# EAGLE board Group_08_alternative (EAGLE 9.6.2)
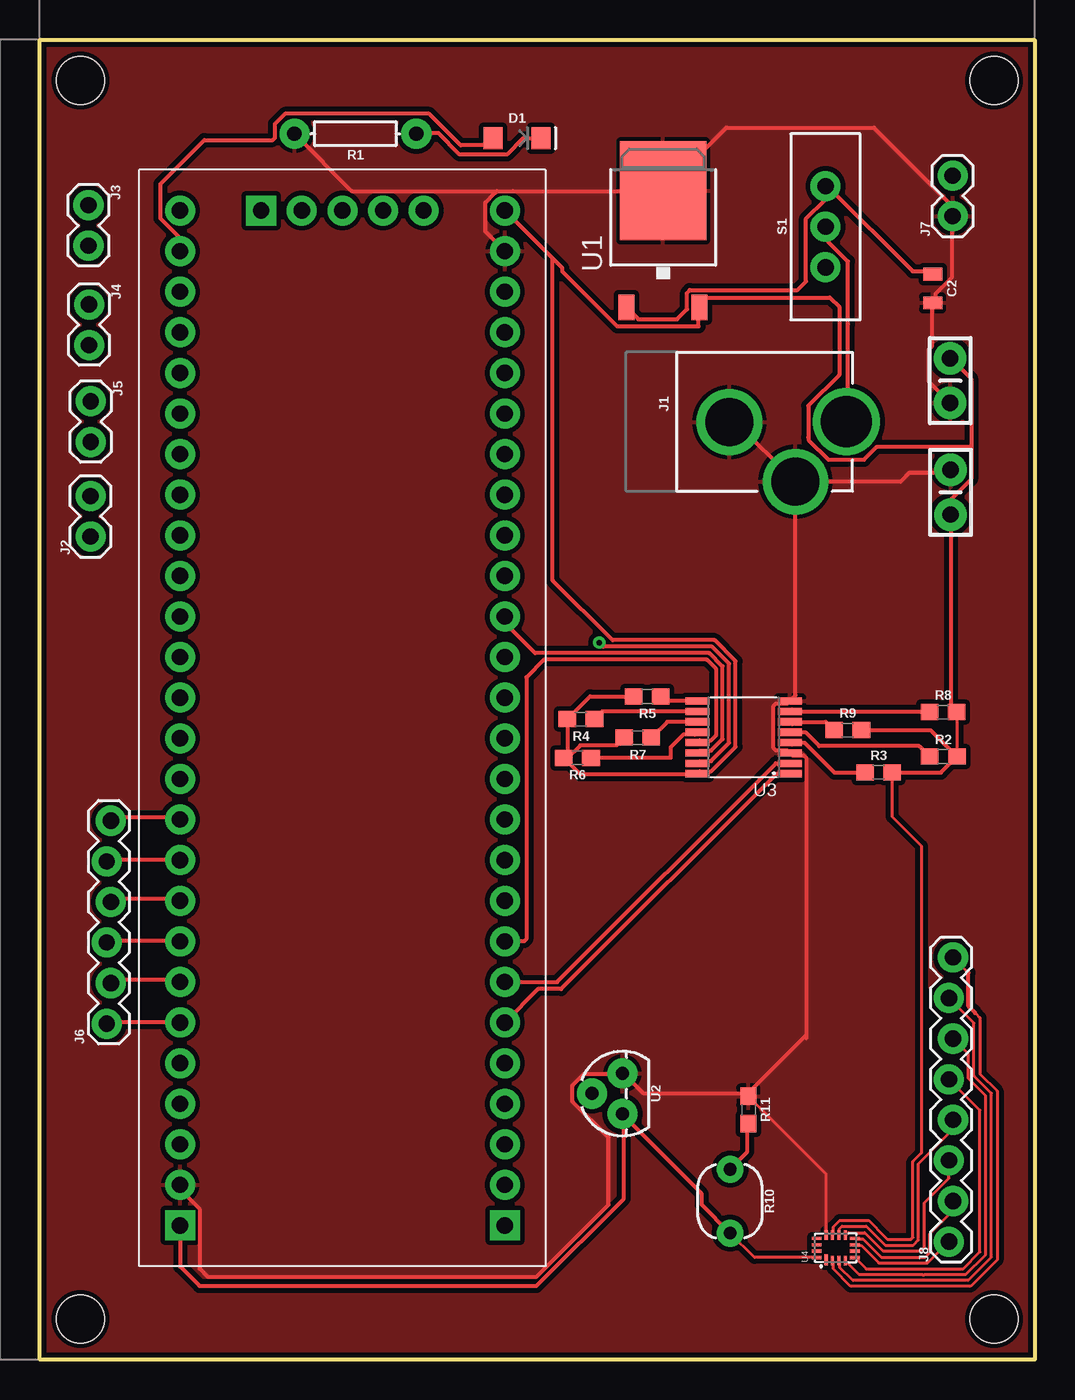
[diagram p0: board, top side]
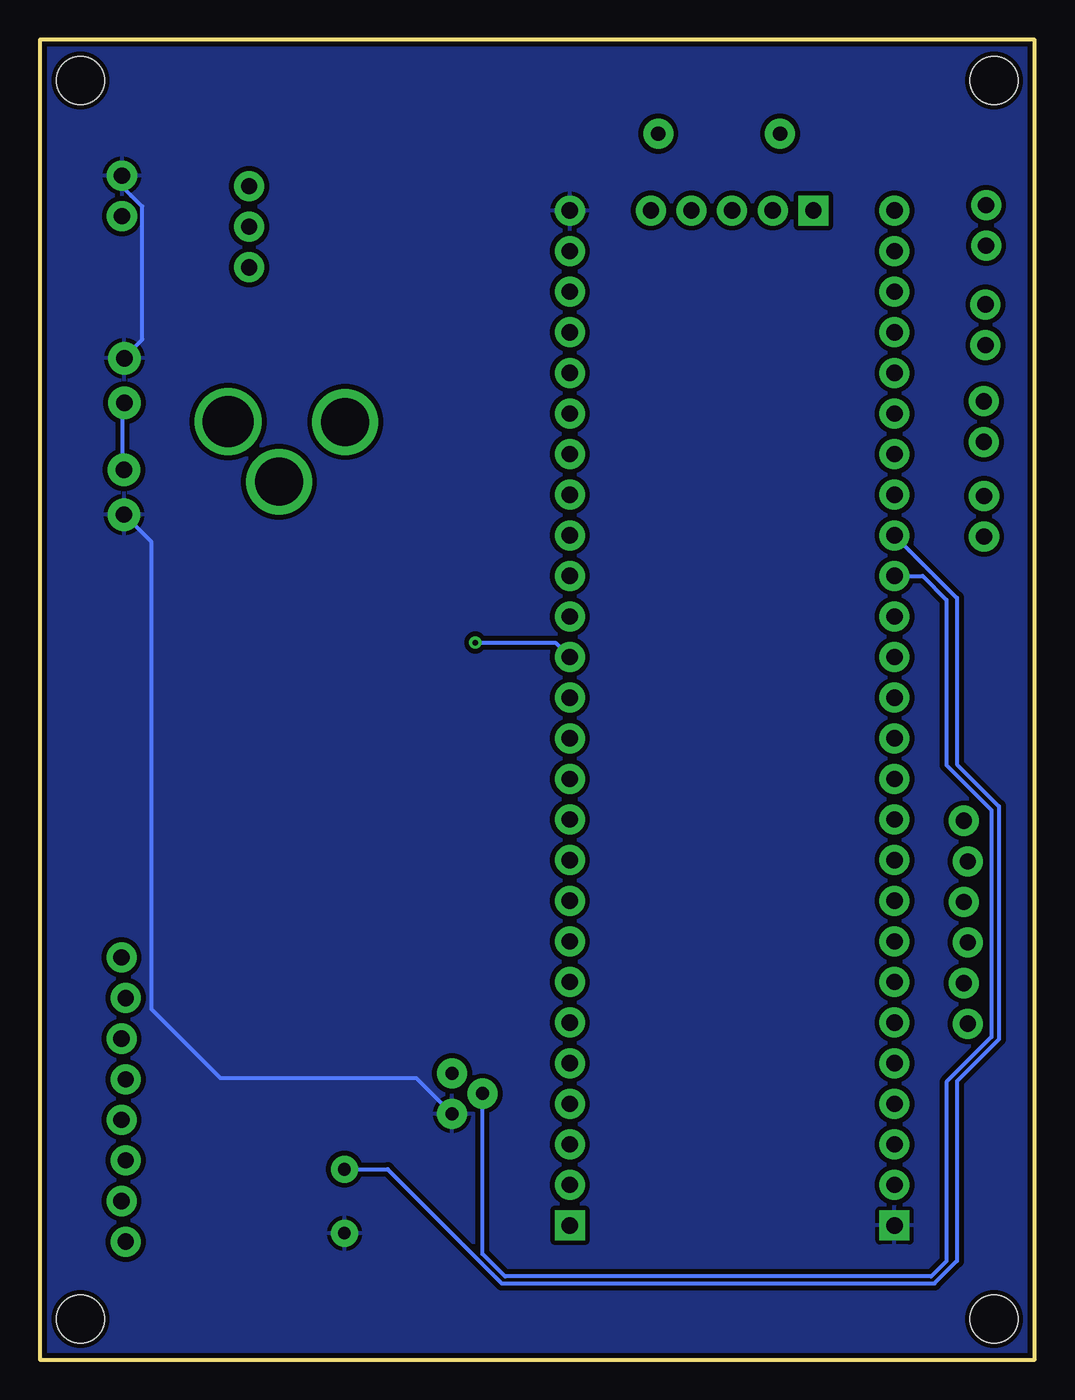
[diagram p1: board, bottom side, seen from below]

Size 62.23 x 82.55 mm. Coordinates in mm from the lower left corner, seen from the top.
Outline: 0,82.55 62.23,82.55 62.23,0 0,0 0,82.55
Copper layers (1*16): Top 0.035mm / dielectric 1.5mm / Bottom 0.035mm
Design rules "default *": minimum track width 6mil, minimum drill 8mil, track to track 6mil, track to pad 6mil, pad to pad 6mil, via to via 6mil, smd to smd 6mil, copper to edge 10mil, drill to drill 6mil, minimum pad ring 10mil, minimum via ring 8mil, stop-mask expansion 8mil, vias tented up to drill 0mil, thermal gap 10mil
Holes 3 mm at 2.54,80.01 59.69,80.01 2.54,2.54 59.69,2.54

## Footprints (pad centres in the part's own frame; a part is rotated, then mirrored left to right if it is on the bottom)
CAP-PTH-SMALL-KIT = drill 1.016 pad 2.032: 1 -1.397,0; 2 1.397,0
0805 = smd 0.8 x 1.2: 1 -0.9,0; 2 0.9,0
CY8CKIT-059_TARGET = drill 1.016 pad 1.876 square: 1 30.48,8.89; 27 30.48,-11.43; 71 -33.02,-6.35 | drill 1.016 pad 1.876: 2 27.94,8.89; 3 25.4,8.89; 4 22.86,8.89; 5 20.32,8.89; 6 17.78,8.89; 7 15.24,8.89; 8 12.7,8.89; 9 10.16,8.89; 10 7.62,8.89; 11 5.08,8.89; 12 2.54,8.89; 13 0,8.89; 14 -2.54,8.89; 15 -5.08,8.89; 16 -7.62,8.89; 17 -10.16,8.89; 18 -12.7,8.89; 19 -15.24,8.89; 20 -17.78,8.89; 21 -20.32,8.89; 22 -22.86,8.89; 23 -25.4,8.89; 24 -27.94,8.89; 25 -30.48,8.89; 26 -33.02,8.89; 28 27.94,-11.43; 29 25.4,-11.43; 30 22.86,-11.43; 31 20.32,-11.43; 32 17.78,-11.43; 33 15.24,-11.43; 34 12.7,-11.43; 35 10.16,-11.43; 36 7.62,-11.43; 37 5.08,-11.43; 38 2.54,-11.43; 39 0,-11.43; 40 -2.54,-11.43; 41 -5.08,-11.43; 42 -7.62,-11.43; 43 -10.16,-11.43; 44 -12.7,-11.43; 45 -15.24,-11.43; 46 -17.78,-11.43; 47 -20.32,-11.43; 48 -22.86,-11.43; 49 -25.4,-11.43; 50 -27.94,-11.43; 51 -30.48,-11.43; 52 -33.02,-11.43; 67 -33.02,3.81; 68 -33.02,1.27; 69 -33.02,-1.27; 70 -33.02,-3.81
LED-1206 = smd 1.2 x 1.4: A -1.5,0; C 1.5,0
POWER_JACK_PTH_LOCK = drill 2.997 pad 4.115: GND 0.025,6.557; GNDBREAK 3.762,10.7 | drill 3.2 pad 4.115: PWR 0,13.878
1X02 = drill 1.016 pad 1.88: 1 0,0; 2 2.54,0
1X06_LOCK = drill 1.016 pad 1.88: 1 0,0; 2 2.54,-0.254; 3 5.08,0; 4 7.62,-0.254; 5 10.16,0; 6 12.7,-0.254
1X08_LOCK = drill 1.016 pad 1.88: 1 0,0.127; 2 2.54,-0.127; 3 5.08,0.127; 4 7.62,-0.127; 5 10.16,0.127; 6 12.7,-0.127; 7 15.24,0.127; 8 17.78,-0.127
AXIAL-0.3 = drill 0.9 pad 1.88: P$1 -3.81,0; P$2 3.81,0
0603 = smd 1.1 x 1: 1 -0.85,0; 2 0.85,0
PHOTOCELL = drill 0.8 pad 1.676: 1 -2,0; 2 2,0
SWITCH_SPDT_PTH_11.6X4.0MM = drill 1.016 pad 1.88: 1 0,2.54; 2 0,0; 3 0,-2.54
TO-252 = smd 1 x 1.6: 1 -2.28,-4.8; 2 2.28,-4.8 | smd 5.4 x 6.2: 3 0,2.5
TO-92 = drill 0.813 pad 1.88: 1 -1.27,0; 2 0,1.905; 3 1.27,0
TSSOP16 = smd 1.5 x 0.45: 1 -2.9,2.275; 2 -2.9,1.625; 3 -2.9,0.975; 4 -2.9,0.325; 5 -2.9,-0.325; 6 -2.9,-0.975; 7 -2.9,-1.625; 8 -2.9,-2.275; 9 2.9,-2.275; 10 2.9,-1.625; 11 2.9,-0.975; 12 2.9,-0.325; 13 2.9,0.325; 14 2.9,0.975; 15 2.9,1.625; 16 2.9,2.275
QFN16 = smd 0.7 x 0.2: 1 -0.75,0.6 | smd 0.6 x 0.2: 2 -0.8,0.2; 3 -0.8,-0.2; 4 -0.8,-0.6; 9 0.8,-0.6; 10 0.8,-0.2; 11 0.8,0.2; 12 0.8,0.6 | smd 0.2 x 0.6: 5 -0.6,-1.2; 6 -0.2,-1.2; 7 0.2,-1.2; 8 0.6,-1.2; 13 0.6,1.2; 14 0.2,1.2; 15 -0.2,1.2; 16 -0.6,1.2

## Placement (x,y rotation side)
C1  0.1uF  [CAP-PTH-SMALL-KIT]  56.97,54.25 90 top
C2  0.33µF  [0805]  55.85,67.01 270 top
C3  0.1uF  [CAP-PTH-SMALL-KIT]  56.95,61.24 270 top
CY8CKIT059-TARGET  CY8CKIT-059_TARGET  [CY8CKIT-059_TARGET]  20.19,38.86 270 top
D1  BLUE  [LED-1206]  29.84,76.4 0 top
J1  POWER_JACKPTH_LOCK  [POWER_JACK_PTH_LOCK]  36.58,58.67 270 top
J2  [1X02]  3.16,51.48 90 top
J3  [1X02]  3.03,72.22 270 top
J4  [1X02]  3.07,66 270 top
J5  [1X02]  3.18,59.94 270 top
J6  [1X06_LOCK]  4.18,21.01 90 top
J7  [1X02]  57.1,71.53 90 top
J8  [1X08_LOCK]  57,7.37 90 top
R1  [AXIAL-0.3]  19.74,76.68 180 top
R2  4.7k  [0603]  56.52,37.72 0 top
R3  4.7k  [0603]  52.47,36.72 0 top
R4  4.7k  [0603]  33.84,40.06 180 top
R5  4.7k  [0603]  38,41.48 180 top
R6  4.7k  [0603]  33.63,37.65 180 top
R7  4.7k  [0603]  37.4,38.9 180 top
R8  4.7k  [0603]  56.5,40.49 0 top
R9  4.7k  [0603]  50.54,39.37 0 top
R10  PHOTOCELLPTH  [PHOTOCELL]  43.18,9.91 270 top
R11  10k  [0603]  44.32,15.62 270 top
S1  [SWITCH_SPDT_PTH_11.6X4.0MM]  49.15,70.87 0 top
U1  +12v  [TO-252]  38.99,70.61 0 top
U2  [TO-92]  36.45,16.64 90 top
U3  TCA9546ATSSOP  [TSSOP16]  44.02,38.92 180 top
U4  TMUX1208  [QFN16]  49.78,6.99 90 top

## Library data of the parts
C1 C3 = SparkFun-Capacitors; PROD_ID: CAP-08370
C2 = SparkFun-Capacitors; PROD_ID: CAP-08469
CY8CKIT059-TARGET = CY8KIT-059
D1 = SparkFun-LED; PROD_ID: DIO-09911
J1 = SparkFun-Connectors; PROD_ID: CONN-08197; SF_ID: PRT-00119
J2-J8 = SparkFun-Connectors
R1 = SparkFun-Resistors
R2-R9 = SparkFun-Resistors; PROD_ID: RES-07857
R10 = SparkFun-Sensors; PROD_ID: COMP-09129; SF_ID: SEN-09088
R11 = SparkFun-Resistors; PROD_ID: RES-00824
S1 = SparkFun-Switches; PROD_ID: SWCH-08261; SF_SKU: COM-00102
U1 = SparkFun-IC-Power; PROD_ID: VREG-12370
U2 = SparkFun-Sensors; PROD_ID: IC-09880; SF_ID: SEN-10988
U3 U4 = Group_08_Library

## Nets
5V: C1.1 C3.1 CY8CKIT059-TARGET.26 CY8CKIT059-TARGET.27 J7.2 R2.2 R3.2 R4.2 R5.2 R6.2 R7.2 R8.2 R9.2 R10.2 U1.2 U2.1 U3.16 U4.11 U4.16
12V: C2.1 S1.1 U1.1
GND: C1.2 C2.2 C3.2 CY8CKIT059-TARGET.25 CY8CKIT059-TARGET.28 J1.GND J1.GNDBREAK J7.1 R1.P$2 R11.1 U1.3 U2.3 U3.3 U3.8 U4.12
I2C_A0: CY8CKIT059-TARGET.6 U3.1
I2C_A1: CY8CKIT059-TARGET.7 U3.2
I2C_A2: CY8CKIT059-TARGET.8 U3.13
I2C_SCL: CY8CKIT059-TARGET.16 U3.14
I2C_SCL_0: J2.2
I2C_SCL_1: J3.2
I2C_SCL_2: J4.2
I2C_SCL_3: J5.2
I2C_SDA: CY8CKIT059-TARGET.15 U3.15
I2C_SDA_0: J2.1
I2C_SDA_1: J3.1
I2C_SDA_2: J4.1
I2C_SDA_3: J5.1
MUX_A0/1.3C: U4.15
MUX_A0/2.3C: CY8CKIT059-TARGET.24
MUX_A1/1.4C: U4.14
MUX_A1/2.3C: CY8CKIT059-TARGET.23
MUX_A2/1.4C: U4.13
MUX_A2/2.3C: CY8CKIT059-TARGET.22
MUX_OUT/1.4C: U4.6
MUX_OUT/2.5C: CY8CKIT059-TARGET.21
N$1: R2.1 U3.5
N$2: J1.PWR S1.2
N$3: R3.1 U3.4
N$4: R8.1 U3.7
N$5: R9.1 U3.6
N$6: R4.1 U3.10
N$7: R5.1 U3.9
N$8: R6.1 U3.12
N$9: R7.1 U3.11
N$10: J8.1 U4.7
N$11: J8.2 U4.8
N$12: J8.3 U4.9
N$13: J8.4 U4.10
N$14: J8.5 U4.5
N$16: J8.6 U4.4
N$17: J8.7 U4.3
N$18: J8.8 U4.2
N$19: CY8CKIT059-TARGET.37 J6.6
N$20: CY8CKIT059-TARGET.32 J6.1
N$21: CY8CKIT059-TARGET.33 J6.2
N$22: CY8CKIT059-TARGET.34 J6.3
N$23: CY8CKIT059-TARGET.35 J6.4
N$24: CY8CKIT059-TARGET.36 J6.5
N$25: D1.C R1.P$1
N$26: CY8CKIT059-TARGET.51 D1.A
PHOTO_OUT: CY8CKIT059-TARGET.44 R10.1 R11.2
TEMP_OUT: CY8CKIT059-TARGET.43 U2.2

## Tracks (layer width: path | path; a pad name or v marks a point on that pad's centre or on a via)
5V
  Top 0.203: 52.82,7.72 51.84,8.7 50.03,8.7 49.63,8.29 49.63,7.83 U4.11 | 52.82,7.72 | 52.82,7.72 53.02,7.52 54.5,7.52 54.61,7.63 54.61,12.38 55.15,12.93 55.15,32.12 53.32,33.95 R3.2 | U4.16 44.7,6.38 R10.2 | R8.2 57.35,37.87 57.29,37.8
  Top 0.254: 58.27,57.1 58.27,61.37 57.05,62.59 C3.1 | 58.27,57.1 58.27,55.07 57.05,53.85 57.05,53.03 C1.1 56.97,40.88 R8.2 | 41.2,65.63 41.2,66.44 49.41,66.44 50,65.86 50,61.6 48.07,59.66 48.07,57.69 48.09,57.66 48.09,57.53 49.33,56.29 51.56,56.29 52.38,57.1 58.27,57.1 | 41.2,65.63 41.2,64.62 36.12,64.62 32.66,68.07 32.66,68.3 CY8CKIT059-TARGET.26 32.08,68.89 32.08,48.74 35.82,45 42.22,45 43.53,43.7 43.53,38.33 41.99,36.79 41.27,36.79 U3.16 41.12,36.63 33.8,36.63 32.95,37.48 | 41.2,65.63 U1.2 | 36.52,15.24 41.4,10.36 41.4,9.68 R10.2 | 36.52,15.24 U2.1 | CY8CKIT059-TARGET.27 8.76,5.82 9.98,4.6 31.06,4.6 36.52,10.06 36.52,15.24 | R3.2 56.37,36.72 R2.2 57.29,37.8 55.72,39.37 R9.2 | R6.2 32.86,37.56 | 32.86,37.56 32.95,37.48 | R5.2 34.42,41.48 R4.2 32.99,37.53 32.95,37.48 | 32.86,37.56 32.95,37.56 33.81,38.43 36.08,38.43 R7.2
  Bottom 0.254: J7.2 57.05,73.97 57.05,73.36 55.83,72.14 55.83,63.8 56.84,62.79 C3.1 | U2.1 38.68,17.6 50.93,17.6 55.24,21.91 55.24,51.13 C1.1
  pour Bottom (isolate 0.305): 0,0 62.23,0 62.23,82.55 0,82.55
12V
  Top 0.254: C2.1 55.83,68.07 54.61,68.07 49.33,73.36 S1.1 49.12,73.36 49.12,72.56 47.93,71.37 47.93,67.44 47.39,66.9 40.64,66.9 40.64,66.88 40.49,66.73 40.49,65.71 39.86,65.08 37.44,65.08 U1.1
GND
  Top 0.203: R11.1 49.18,11.61 U4.12
  Top 0.254: 57.05,71.53 57.05,67.67 56.03,66.65 56.03,66.24 C2.2 55.83,66.04 55.83,63.4 55.63,63.2 55.63,61.16 C3.2 | 57.05,71.53 J7.1 | J1.GND 43.23,58.52 43.64,58.52 47.09,55.07 J1.GNDBREAK | C1.2 56.84,55.47 54.41,55.47 53.85,54.91 J1.GNDBREAK | CY8CKIT059-TARGET.28 8.76,10.65 9.98,9.44 9.98,5.7 10.49,5.19 31.08,5.19 35.57,9.68 35.57,13.89 33.33,16.13 33.33,17.14 34.04,17.86 36.4,17.86 U2.3 36.52,17.88 37.74,16.66 44.25,16.66 R11.1 44.32,16.69 47.95,20.32 | CY8CKIT059-TARGET.25 27.87,70.56 27.87,72.39 28.47,72.99 28.47,73.08 28.56,73.08 28.58,73.1 | 28.58,73.1 29.59,73.1 29.61,73.08 38.21,73.08 38.21,72.39 38.41,72.39 38.96,72.95 U1.3 42.94,77.06 52.17,77.06 57.05,72.19 57.05,71.53 | R1.P$2 19.51,73.1 28.58,73.1 | 47.95,20.32 47.95,37.64 47.79,37.8 47.07,37.8 U3.3 46.77,38.09 46.05,38.09 45.89,38.25 45.89,40.89 46.05,41.05 46.77,41.05 U3.8 47.28,41.55 J1.GNDBREAK | 47.95,20.32 47.95,20.1
  Bottom 0.254: C3.2 57.05,59.74 57.05,55.68 C1.2
  pour Top (isolate 0.305): 0,0 62.23,0 62.23,82.55 0,82.55
I2C_A0
  Top 0.254: U3.1 46.08,36.65 32.61,23.17 31.18,23.17 CY8CKIT059-TARGET.6
I2C_A1
  Top 0.254: CY8CKIT059-TARGET.7 32.36,23.62 46.03,37.3 U3.2
I2C_A2
  Top 0.254: CY8CKIT059-TARGET.8 30.29,26.16 30.43,26.31 30.43,42.68 31.54,43.78 41.71,43.78 42.31,43.19 42.31,39.06 41.99,38.74 41.27,38.74 U3.13
I2C_SCL
  Top 0.254: U3.14 41.27,38.09 41.99,38.09 42.71,38.82 42.71,43.36 41.88,44.19 30.98,44.19 29.08,46.09 CY8CKIT059-TARGET.16
I2C_SDA  (via drill 0.35)
  Top 0.254: v34.99,44.85 35.24,44.6 42.05,44.6 43.12,43.53 43.12,38.57 41.99,37.44 41.27,37.44 U3.15
  Bottom 0.254: v34.99,44.85 29.99,44.85 CY8CKIT059-TARGET.15
N$1
  Top 0.254: U3.5 47.89,39.24 48.75,38.38 55.01,38.38 R2.1
N$2
  Top 0.254: S1.2 49.33,70.71 49.33,69.9 50.55,68.68 50.55,64.77 50.55,58.73 J1.PWR
N$3
  Top 0.254: 47.07,38.45 U3.4 47.84,38.59 49.71,36.72 R3.1
N$4
  Top 0.254: 47.07,40.69 U3.7 55.6,40.55 R8.1 55.46,40.69
N$5
  Top 0.254: 47.07,39.75 U3.6 49.16,39.9 R9.1
N$6
  Top 0.254: U3.10 35.18,40.55 R4.1
N$7
  Top 0.254: U3.9 39.13,41.2 R5.1
N$8
  Top 0.254: U3.12 40.97,39.1 40.25,39.1 39.45,38.3 39.45,37.65 R6.1
N$9
  Top 0.254: U3.11 39.25,39.9 R7.1
N$10
  Top 0.203: U4.7 51.03,7.14 51.39,7.14 52.48,6.04 55.54,6.04 J8.1
N$11
  Top 0.203: U4.8 51.03,7.54 51.49,7.54 52.63,6.4 55.4,6.4 55.74,6.75 55.74,6.82 55.68,6.88 55.68,7.87 57.13,9.32 J8.2
N$12
  Top 0.203: U4.9 50.42,7.79 50.58,7.94 51.59,7.94 52.73,6.8 55.1,6.8 55.32,7.03 55.32,9.8 56.87,11.35 J8.3
N$13
  Top 0.203: U4.10 50.03,7.83 50.03,8.19 50.18,8.34 51.7,8.34 52.88,7.16 54.65,7.16 54.97,7.48 54.97,12.24 57.13,14.4 J8.4
N$14
  Top 0.203: J8.5 58.81,15.59 58.81,6.73 57.76,5.67 55.49,5.67 55.35,5.67 51.7,5.67 U4.5
N$16
  Top 0.203: J8.6 58.08,19.12 58.08,17.6 58.2,17.47 58.21,17.47 59.17,16.51 59.17,6.57 57.91,5.3 55.34,5.3 55.22,5.3 51.27,5.3 U4.4
N$17
  Top 0.203: 58.08,4.95 | J8.7 58.43,21.05 58.43,17.75 59.52,16.66 59.52,6.4 58.31,5.18 58.08,4.95 | U4.3 50.03,6.14 50.03,5.78 50.86,4.95 58.08,4.95
N$18
  Top 0.203: 58.06,24.23 J8.8 | 58.52,21.68 58.81,21.39 58.81,17.87 59.88,16.8 59.88,6.24 58.24,4.59 50.72,4.59 49.63,5.68 49.63,6.14 U4.2
  Top 0.254: 58.52,21.68 58.09,22.11 58.09,24.19 58.06,24.23
N$19
  Top 0.254: CY8CKIT059-TARGET.37 8.69,33.93 4.66,33.93 J6.6
N$20
  Top 0.254: CY8CKIT059-TARGET.32 8.69,21.13 4.18,21.13 J6.1
N$21
  Top 0.254: CY8CKIT059-TARGET.33 8.69,23.77 4.66,23.77 J6.2
N$22
  Top 0.254: CY8CKIT059-TARGET.34 8.69,26.21 4.18,26.21 J6.3
N$23
  Top 0.254: CY8CKIT059-TARGET.35 8.69,28.85 4.66,28.85 J6.4
N$24
  Top 0.254: CY8CKIT059-TARGET.36 8.69,31.29 4.18,31.29 J6.5
N$25
  Top 0.254: D1.C 30.23,76.4 29.21,75.39 26.26,75.39 24.93,76.72 23.58,76.72 R1.P$1
N$26
  Top 0.254: CY8CKIT059-TARGET.51 8.76,70.16 7.55,71.38 7.55,73.54 10.28,76.28 14.55,76.28 14.71,76.44 14.71,77.31 15.34,77.94 24.34,77.94 26.32,75.96 27.9,75.96 D1.A
PHOTO_OUT
  Top 0.254: R11.2 44.25,14.63 44.25,13.01 43.23,11.99 R10.1
  Bottom 0.254: R10.1 40.48,11.91 33.34,4.76 6.26,4.76 4.85,6.17 4.85,17.41 2.23,20.03 2.23,34.61 4.85,37.23 4.85,47.65 CY8CKIT059-TARGET.44
TEMP_OUT
  Bottom 0.254: CY8CKIT059-TARGET.43 7.01,49.02 5.51,47.53 5.51,37.18 2.7,34.37 2.7,20.17 5.51,17.36 5.51,6.16 6.47,5.2 33.13,5.2 34.54,6.61 U2.2